# Altium PCB w38_dmx512_master_PCB.PcbDoc
Units mil, origin at the board's own origin, x right, y up, seen from the top; angles counter-clockwise.
Board outline 6000 x 4000 mil, 2 copper layers (Top Layer, Bottom Layer); 23 components, 14 nets, 85 pads, 0 vias.
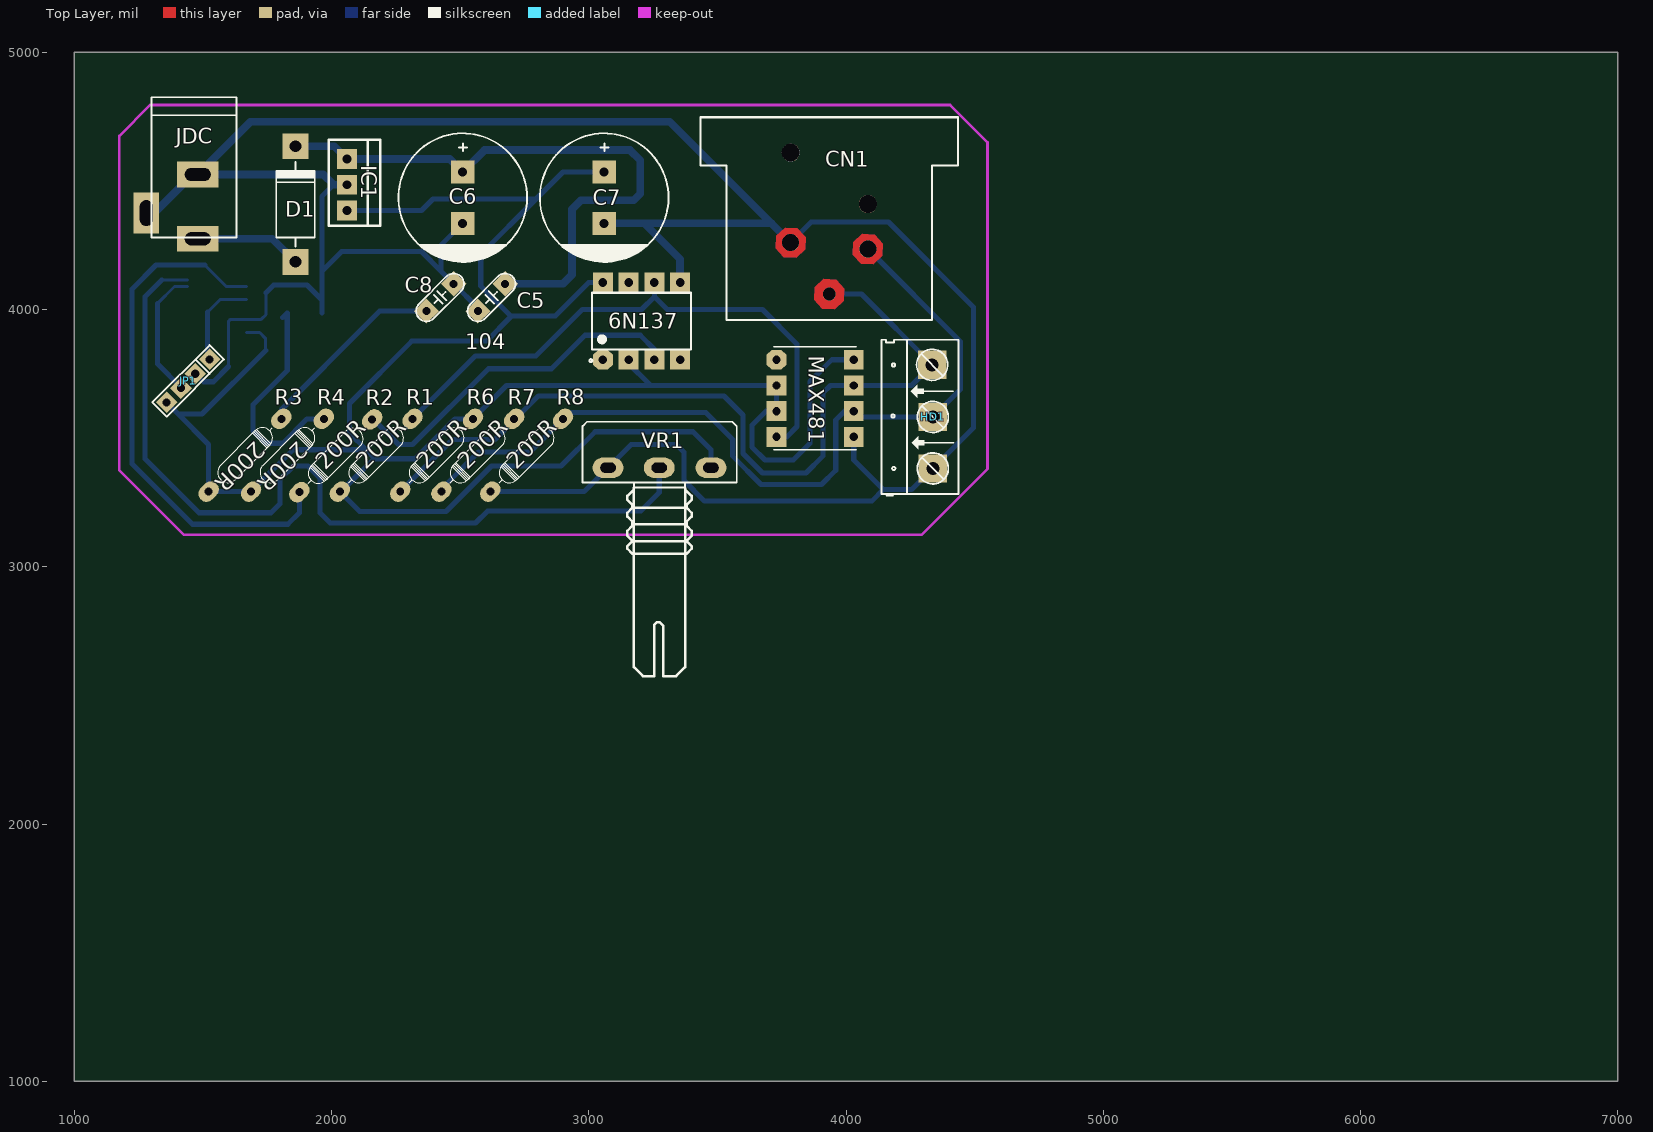
[diagram p0: Top Layer view]
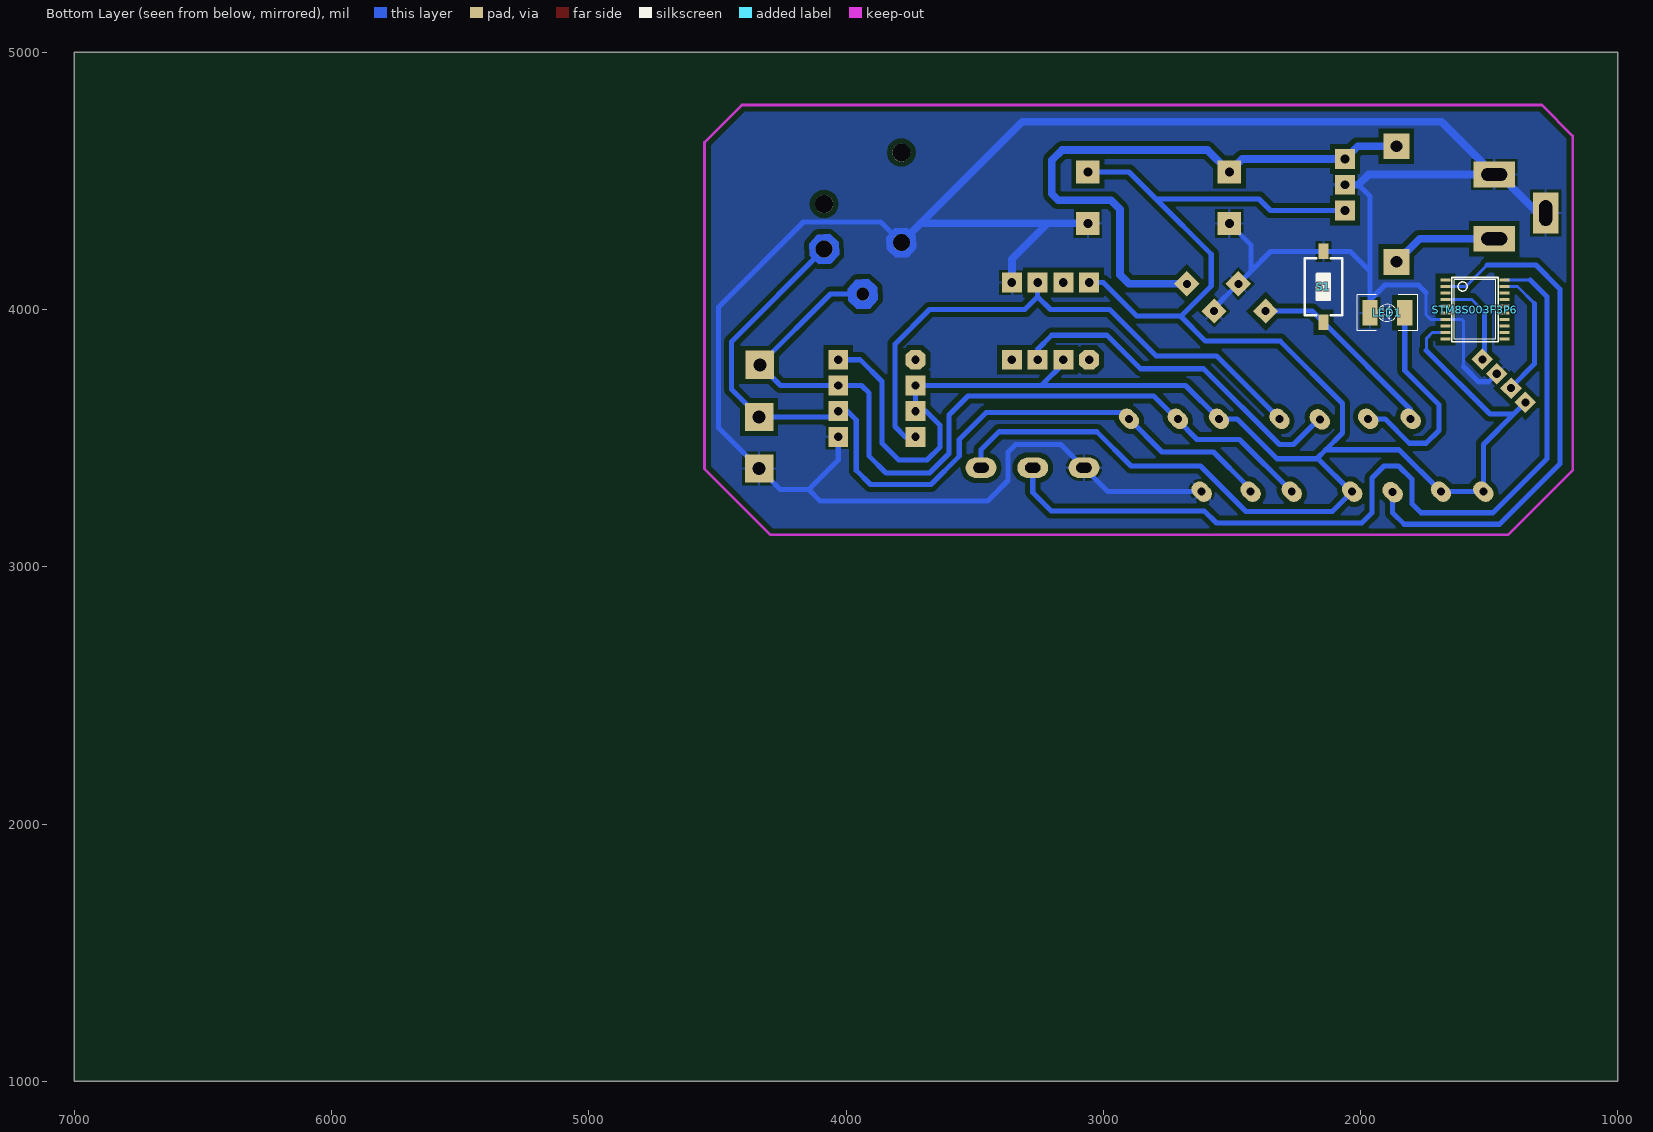
[diagram p1: Bottom Layer view, seen from below]
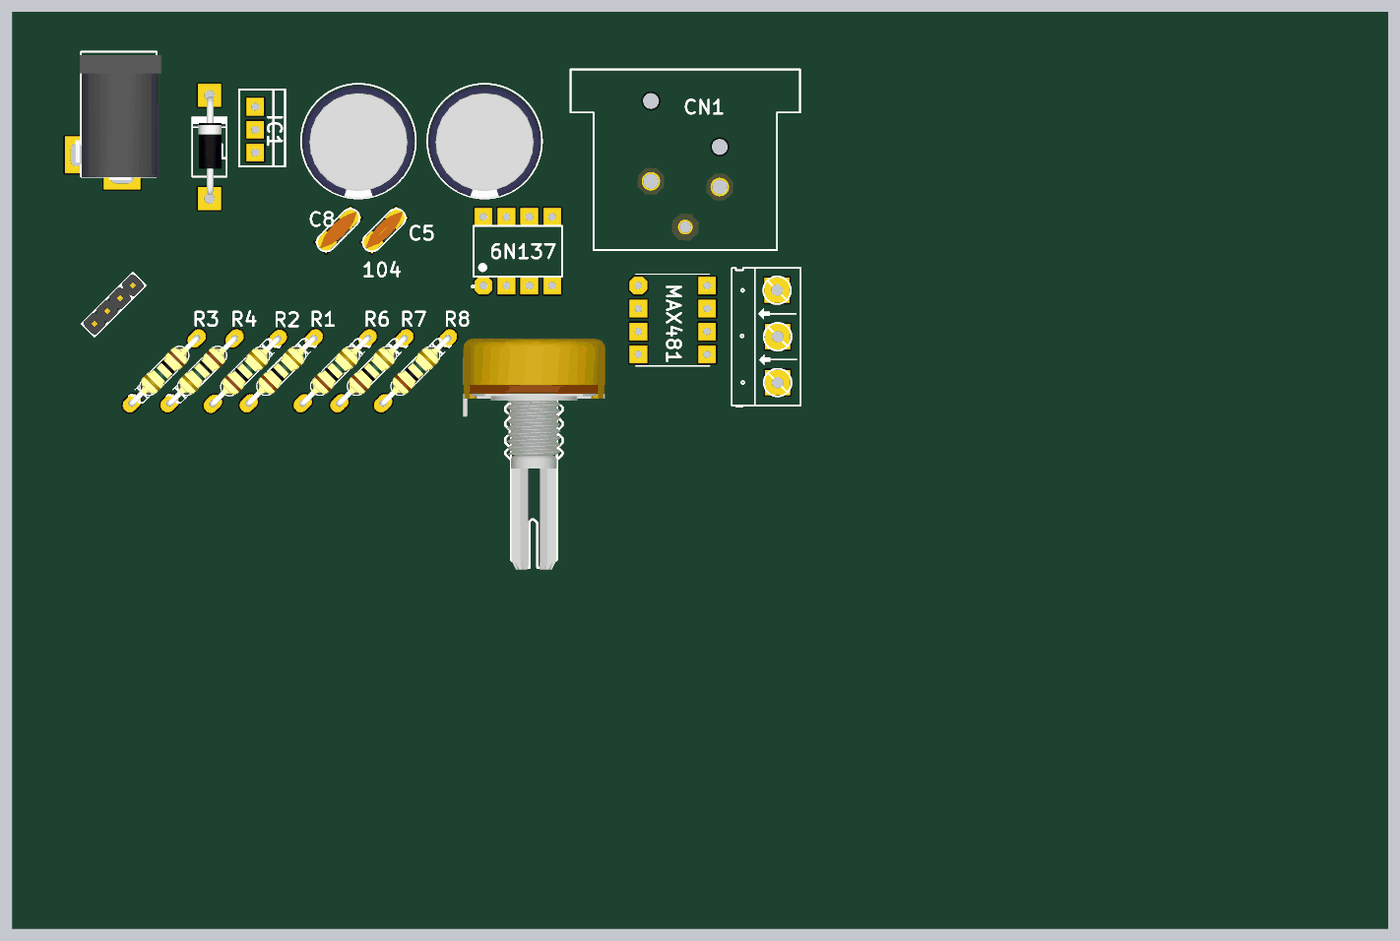
[diagram p2: 3D render of the assembled board from above, using the file's embedded part models]

## Layer stack, top to bottom
Top Solder: solder mask 0.4, Solder Resist, Dk 3.5
Top Layer: signal copper 1.4
Dielectric 1: dielectric 12.6, FR-4, Dk 4.8
Bottom Layer: signal copper 1.4
Bottom Solder: solder mask 0.4, Solder Resist, Dk 3.5

## Board outline
1000,1000 7000,1000 7000,5000 1000,5000

## Design rules (kind name [scope] priority, off if disabled: settings)
Clearance [All] p1: gap=20
PolygonConnect [All] p1: connectstyle=Relief reliefconductorwidth=10 reliefentries=4 polygonreliefangle="90 Angle" airgapwidth=10
RoutingLayers [All] p1: top layer_v5=FALSE bottom layer_v5=TRUE
RoutingVias [All] p1: holewidth=28 width=50 viastyle="Through Hole" minholewidth=28 minwidth=50 maxholewidth=28 maxwidth=50
SolderMaskExpansion [All] p1: expansion=7
Width [All] p1: maxlimit=30 minlimit=12 preferedwidth=20 toplayer_minwidth=20 minimp=50.000000 maximp=50.000000 favimp=50.000000
29 further rules are at their usual default settings.

## Components (designator, comment, footprint, x,y, rotation, side; value= is the part's Value field where it differs from the comment)
6N137 "6N137" DIP762W50P254L977H451Q8 3205,3955 r90 top
C5 "104" CN150 2621.97,4046.97 r45 top
C6 "Cap Pol3" CP2/5 2510,4535 r270 top
C7 "Cap Pol3" CP2/5 3060,4535 r270 top
C8 "104" CN150 2421.97,4046.97 r45 top
CN1 "NC3FBH1" NC3FBH1 3935,4260 r0 top
D1 "1N4007" D2A 1860,4635 r270 top
HD1 "Header 3" HED3 4337.62,3382.38 r90 top
IC1 "LM7805" 7805 2060,4485 r270 top
JDC "Jac DC" DC-IN 1380,4400 r270 top
JP1 "JP4x1-2.0" J4-D1T 1442.48,3722.48 r225 top
LED1 "LED" LED-RED-0805 1828,3987 r0 bottom
MAX481 "MAX481CPA" 21-0043D_8 4030,3505 r0 top
R1 "R0.4W" "DIEN TRO 1/4 W" 2032.16,3292.16 r45 top
R2 "R0.4W" "DIEN TRO 1/4 W" 1875,3290 r45 top
R3 "R0.4W" "DIEN TRO 1/4 W" 1805,3575 r225 top
R4 "R0.4W" "DIEN TRO 1/4 W" 1970,3575 r225 top
R6 "R0.4W" "DIEN TRO 1/4 W" 2267.16,3292.16 r45 top
R7 "R0.4W" "DIEN TRO 1/4 W" 2427.16,3292.16 r45 top
R8 "R0.4W" "DIEN TRO 1/4 W" 2617.16,3292.16 r45 top
S1 "SW-SMD" SW-SMD 2144,4088 r90 bottom
STM8S003F3P6 "STM8S003F3P6" TSSOP20 1555,4000 r270 bottom
VR1 "10k" VR-S1 3275,3385 r0 top

## Footprints (in the part's own frame and the unit in brackets; to place one, negate y for a bottom-side part, rotate by r counter-clockwise, add the part's x,y. Pads: shape width x height; smd on the part's side, far side on the other; paste and mask are expansions set on the pad)
21-0043D_8 [mil]
  oct 77x77 hole 32: 1(-300,300)
  rect 77x77 hole 32: 2(-300,200) 3(-300,100) 4(-300,0) 5(0,0) 6(0,100) 7(0,200) 8(0,300)
  silkscreen extent -310,-50 10,350
7805 [mil]
  rect 77x77 hole 34: 1(-100,0) 2(0,0) 3(100,0)
  silkscreen extent -175,-70 160,130
CN150 [mil]
  rect 70x70 hole 31: 1(-75,0) 2(75,0)
  silkscreen extent -115,-40 115,40, body extent -115,-33 115,33, height 235
CP2/5 [mil] "Tu hoa 1000uF/25V,50V"
  rect 90x90 hole 35: 1(0,0) 2(200,0)
  silkscreen extent -150,-250 350,250, body extent -142,-246 350,246, height 984
D2A [mil] "Diode 2A, W 150mil, L 450mil"
  rect 100x100 hole 45: 1(450,0) 2(0,0)
  silkscreen extent 61,-75 391,75, body extent 5,-47 435,54, height 100
DC-IN [mil] "Jac DC input"
  rect 100x160 hole 50 slot 100 at 90 deg: 1(125,100) 2(-125,100)
  rect 160x100 hole 50 slot 100 at 0 deg: 3(25,-100)
  silkscreen extent -425,-80 120,250, body extent -410,-105 134,269, height 434
"DIEN TRO 1/4 W" [mm]
  oval 2.2x1.6 hole 0.787: 1(0,0) 2(10.16,0)
  silkscreen extent 1.26,-1.02 8.88,1.02, body extent -0.3,-1.16 10.46,1.16, height 2.93
DIP762W50P254L977H451Q8 [mil]
  oct 77x77 hole 33.46: 1(-150,150)
  rect 77x77 hole 33.46: 2(-150,50) 3(-150,-50) 4(-150,-150) 5(150,-150) 6(150,-50) 7(150,50) 8(150,150)
  silkscreen extent -159,-193 110,202
HED3 [mil] "Header 3, 3 pin, hight 300mil, Pin to Pin 200, Colour Green"
  rect 110x110 hole 50: 1(0,0) 2(200,0) 3(402.62,2.62)
  silkscreen extent -106,-100 500,200
J4-D1T [mil] "4 pins, 1 row, straight, gold plating"
  rect 60x60 hole 31.5: 1(-118.11,0) 2(-39.37,0) 3(39.37,0) 4(118.11,0)
  silkscreen extent -157,-39 157,39, body extent -157,-39 157,39, height 237
LED-RED-0805 [mil]
  rect 60x100 smd: 1(0,0) 2(135,0)
  silkscreen extent -50,-70 185,70, body extent -20,-60 154,60, height 75
NC3FBH1 [mil]
  round 66 hole 66: 1(-150,0) 2(150,-25)
  round 50 hole 50: 3(0,-200)
  round 70 hole 70 unplated: None(-150,350) None(150,150)
  Top Layer region: -91.27,21.38 -123.59,56.64 -171.38,58.73 -206.64,26.41 -208.73,-21.38 -176.41,-56.64 -128.62,-58.73 -93.36,-26.41
  Top Layer region: 58.73,-178.62 26.41,-143.36 -21.38,-141.27 -56.64,-173.59 -58.73,-221.38 -26.41,-256.64 21.38,-258.73 56.64,-226.41
  Top Layer region: 208.73,-3.62 176.41,31.64 128.62,33.73 93.36,1.41 91.27,-46.38 123.59,-81.64 171.38,-83.73 206.64,-51.41
  Bottom Layer region: -91.27,21.38 -123.59,56.64 -171.38,58.73 -206.64,26.41 -208.73,-21.38 -176.41,-56.64 -128.62,-58.73 -93.36,-26.41
  Bottom Layer region: 58.73,-178.62 26.41,-143.36 -21.38,-141.27 -56.64,-173.59 -58.73,-221.38 -26.41,-256.64 21.38,-258.73 56.64,-226.41
  Bottom Layer region: 208.73,-3.62 176.41,31.64 128.62,33.73 93.36,1.41 91.27,-46.38 123.59,-81.64 171.38,-83.73 206.64,-51.41
  Multi-Layer region: -91.27,21.38 -123.59,56.64 -171.38,58.73 -206.64,26.41 -208.73,-21.38 -176.41,-56.64 -128.62,-58.73 -93.36,-26.41
  Multi-Layer region: 58.73,-178.62 26.41,-143.36 -21.38,-141.27 -56.64,-173.59 -58.73,-221.38 -26.41,-256.64 21.38,-258.73 56.64,-226.41
  Multi-Layer region: 208.73,-3.62 176.41,31.64 128.62,33.73 93.36,1.41 91.27,-46.38 123.59,-81.64 171.38,-83.73 206.64,-51.41
  silkscreen extent -500,-300 500,488
SW-SMD [mil] "Switch SMD type"
  rect 60x40 smd: 1(-137.8,0) 2(137.8,0)
  silkscreen extent -111,-73 111,73, body extent -120,-73 120,73, height 98
TSSOP20 [mil]
  rect 12x39 smd: 1(-115.16,-114.87) 2(-89.57,-114.87) 3(-63.98,-114.87) 4(-38.39,-114.87) 5(-12.8,-114.87) 6(12.79,-114.87) 7(38.39,-114.87) 8(63.98,-114.87) 9(89.57,-114.87) 10(115.16,-114.87) 11(115.16,114.87) 12(89.57,114.87) 13(63.98,114.87) 14(38.39,114.87) 15(12.79,114.87) 16(-12.8,114.87) 17(-38.39,114.87) 18(-63.98,114.87) 19(-89.57,114.87) 20(-115.16,114.87)
  silkscreen extent -125,-90 125,90
VR-S1 [mil]
  oval 120x78.74 hole 40 slot 60 at 0 deg: 1(-200,0) 2(-1,0) 3(200,0)
  silkscreen extent -299,-810 300,179, body extent -310,-818 310,188, height 839

## Part data
6N137: "High CMR, High Speed TTL Compatible Optocouplers"
C5 C8: library part CN1.5, "Capacitor Ceramic"
C6 C7: "Polarized Capacitor (Surface Mount)"
CN1: "XLR Receptacle; Female; Gold; Horizontal PCB Mount; 0.996 in.; Ground"
D1: library part D1A, "Diode 1A"
HD1: library part Hed3, "Header 3 (Green)"
JDC: library part DCIN, "Jac DC input"
JP1: "WR-PHD 2.00 mm Socket Header"
LED1: library part "LED SMD"
MAX481: "Single Transmitter/Receiver RS-422/RS-485 8-Pin PDIP N"
R1 R2 R3 R4 R6 R7 R8: library part "Res 1/4 W", "Resistor"
S1: "Switch"
STM8S003F3P6: "Mainstream Value line 8-bit MCU with 8 Kbytes Flash, 16 MHz CPU, integrated EEPROM"
VR1: library part VR-S, "Var Resistor"

## Nets (pads, with @x,y where several pads share a name; then routed paths per layer and width w, separated by ;. In a path a pad name is that pad's centre, name@x,y a point inside that pad or via, vN(x,y) a via of type N, cw(c..) or ccw(c..) an arc to the next point about the centre after c; other vN are vias at no path point)
ADC_IN4: STM8S003F3P6.20 VR1.2 | length 3349.1
  Bottom Layer w12: 1340,4115 STM8S003F3P6.20@1439.97,4115
  Bottom Layer w20: 1340,4115 1275,4050 1275,3420 1485,3210 1765,3210 1800,3245 1800,3340 1852,3392 1908,3392 1955,3345 1955,3210 1995,3170 2560,3170 2607.31,3217.31 3202.31,3217.31 3274,3289 3274,3364 VR1.2@3284.5,3374.5
GND: 6N137.5 C5.1 C6.2 C7.2 C8.2 CN1.1 HD1.1 IC1.2 JDC.2 JDC.3 JP1.2 LED1.2 MAX481.5 R8.1 S1.2 STM8S003F3P6.7 VR1.1 | length 10527.7
  Bottom Layer w12: 1600,3778 1600,3955 1606.61,3961.61 STM8S003F3P6.7 1726.61,3961.61 1745,3980 1745,4065
  Bottom Layer w20: JP1.2 1501.64,3719 1541,3719 1600,3778 ; 1745,4065 1775,4095 1905,4095 1963,4037 ; LED1.2 1963,4037 ; 2008,4485 1963,4440 1963,4149 ; C6.2 2425,4250 2425,4150 ; C5.1 2568.93,4006.07 C8.2 2425,4150 ; R8.1 2982.16,3292.16 VR1.1 3165,3475 3340,3475 3370,3445 3370,3335 3450,3255 4100,3255 4145,3300 ; CN1.1 3865,4340 4165,4340 4495,4010 4495,3539.76 HD1.1 4255.24,3300 4145,3300 ; MAX481.5 4030,3415 4145,3300 ; 1963,4037 1963,4149 ; 1963,4149 2039.8,4225.8 S1.2 2349.2,4225.8 2425,4150
  Bottom Layer w30: JDC.3 1310,4375 1460,4525 JDC.2 ; IC1.2 2008,4485 1968,4525 JDC.2 ; C7.2 3215,4335 ; 6N137.5 3355,4195 3215,4335 ; CN1.1 3710,4335 ; JDC.2 1685,4730 3315,4730 3710,4335 ; 3215,4335 3710,4335
Net6N137_3: 6N137.3 R2.2 | length 1368.2
  Bottom Layer w20: R2.2@2165,3570 2260,3475 2315,3475 2610,3770 2855,3770 2985,3900 3200,3900 3255,3845 6N137.3
Net6N137_6: 6N137.6 MAX481.4 R1.2 | length 2239.9
  Bottom Layer w20: R1.2 2560,3820 2795,3820 2975,4000 3205,4000 3255,4050 ; 6N137.6 3255,4050 ; MAX481.4 3770,3505 3810,3545 3810,3865 3675,4000 3305,4000 3255,4050
NetC5_2: C5.2 C6.1 D1.2 IC1.1 | length 2382.5
  Bottom Layer w30: D1.2 2010,4635 IC1.1 2460,4585 C6.1 2595,4620 3160,4620 3200,4580 3200,4450 3175,4425 2970,4425 2935,4390 2935,4135 2900,4100 C5.2
NetC8_1: C8.1 R3.1 S1.1 | length 758.7
  Bottom Layer w20: R3.1 1805,3611.2 S1.1 2187.73,3993.93 C8.1
NetCN1_2: CN1.2 HD1.2 MAX481.6 R7.1 R8.2 | length 3279.5
  Bottom Layer w20: R7.1@2442.16,3292.16 2442.16,3317.16 2571,3446 2771,3446 R8.2 2925,3600 3455,3600 3560,3495 3560,3430 3670,3320 3905,3320 3960,3375 3960,3570 3995,3605 MAX481.6 4052.62,3582.38 HD1.2 4445,3689.76 4445,3875 CN1.2
NetCN1_3: CN1.3 HD1.3 MAX481.7 R6.1 R7.2 | length 3267.9
  Bottom Layer w20: R6.1 2470,3495 2635,3495 2710,3570 R7.2 2715,3575 2804,3664 3526,3664 3600,3590 3600,3440 3675,3365 3845,3365 3910,3430 3910,3675 3940,3705 MAX481.7 4255,3705 HD1.3 4060,4060 CN1.3
NetD1_1: D1.1 JDC.1 | length 417.3
  Bottom Layer w30: JDC.1 1770,4275 D1.1
NetLED1_1: LED1.1 R4.1 | length 872.6
  Bottom Layer w20: LED1.1@1810,3969 LED1.1 1828,3763 1695,3630 1695,3530 1745,3480 1810,3480 1905,3575 R4.1
NRST: JP1.1 STM8S003F3P6.4 | length 359.2
  Bottom Layer w12: 1518,3990 1566.39,4038.39 STM8S003F3P6.4
  Bottom Layer w20: 1518,3990 1518,3814 JP1.1
PD2: JP1.3 STM8S003F3P6.19 | length 510.2
  Bottom Layer w12: 1323,4023 1389.57,4089.57 STM8S003F3P6.19
  Bottom Layer w20: 1323,4023 1323,3789 JP1.3@1416,3696
PD5: R2.1 STM8S003F3P6.2 | length 2054.4
  Bottom Layer w12: 1507,4173 1590,4090 STM8S003F3P6.2@1669.44,4090
  Bottom Layer w20: 1507,4173 1318,4173 1225,4080 1225,3400 1460,3165 1830,3165 1875,3210 R2.1@1875,3282.16 ; R2.1@1867.16,3290 R2.1@1875,3282.16 ; R2.1 R2.1@1875,3282.16
VCC: 6N137.2 6N137.8 C7.1 IC1.3 JP1.4 MAX481.2 MAX481.3 MAX481.8 R1.1 R3.2 R4.2 R6.2 STM8S003F3P6.9 VR1.3 | length 9477.4
  Bottom Layer w12: STM8S003F3P6.9 1720.43,3910.43 1744,3886.87 1744,3841
  Bottom Layer w20: JP1.4 1403.93,3594 ; 1744,3841 1497,3594 1403.93,3594 ; IC1.3 2350,4385 2395,4430 2795,4430 ; 2167.5,3422.5 2135,3455 ; 2697,3975 2580,4092 2580,4215 2795,4430 ; 6N137.8 3000,4105 2870,3975 2700,3975 2602,3877 2312,3877 2070,3635 2070,3520 2135,3455 ; C7.1 2900,4535 2795,4430 ; 6N137.2 3155,3790 3237.5,3707.5 ; VR1.3 3475,3455 3405,3525 3025,3525 2892,3392 2622,3392 2445,3215 2109.32,3215 R1.1 2037.16,3292.16 2165,3420 2325,3420 2480,3575 R6.2 2680,3705 MAX481.2 MAX481.3 3690,3605 3635,3550 3635,3465 3685,3415 3795,3415 3860,3480 3860,3720 3945,3805 MAX481.8 ; 1403.93,3594 1522.16,3475.77 R3.2 R4.2 1850,3455 2135,3455
pads on no net: 6N137.1 6N137.4 6N137.7 CN1.None MAX481.1 STM8S003F3P6.1 STM8S003F3P6.3 STM8S003F3P6.5 STM8S003F3P6.6 STM8S003F3P6.8 STM8S003F3P6.10 STM8S003F3P6.11 STM8S003F3P6.12 STM8S003F3P6.13 STM8S003F3P6.14 STM8S003F3P6.15 STM8S003F3P6.16 STM8S003F3P6.17 STM8S003F3P6.18

## Polygon pours and split planes (outlines as drawn)
GND on Bottom Layer "GND_L02_P012" (solid, pour order 12): 1295,4795 1175,4675 1175,3375 1425,3125 4295,3125 4550,3380 4550,4650 4405,4795
no net on Bottom Layer "NONET_L02_P004" (solid, remove dead copper, pour order 4): 845,1935
no net on Bottom Layer "NONET_L02_P002" (solid, remove dead copper, pour order 2): 1180,4625
no net on Multi-Layer "NONET_L-01_P-001" (solid, remove dead copper): 1175,4675

## Keep-outs
Keep-Out Layer:
  lines w10: 1175,3375 1425,3125 4295,3125 4550,3380 4550,4650 4405,4795 1295,4795 1175,4675 1175,3375

## Text inside footprints (layer, text, board x,y; h text height)
CN1: Mechanical 1 "1" at 3684.87,4275.17 h73.82; Mechanical 1 "3" at 3834.79,4074.79 h73.82; Mechanical 1 "2" at 3985.14,4250.16 h73.82
R1: Top Overlay "200R" at 2148.83,3359.33 h110.24 r45
R2: Top Overlay "200R" at 1991.67,3357.17 h110.24 r45
R3: Top Overlay "200R" at 1688.33,3507.82 h110.24 r225
R4: Top Overlay "200R" at 1853.33,3507.82 h110.24 r225
R6: Top Overlay "200R" at 2383.83,3359.33 h110.24 r45
R7: Top Overlay "200R" at 2543.83,3359.33 h110.24 r45
R8: Top Overlay "200R" at 2733.83,3359.33 h110.24 r45